# Altium PCB PCB copy.pcbdoc (part 1 of 2)
Units mm, origin at the board's own origin, x right, y up, seen from the top; angles counter-clockwise.
Board outline 125.72 x 116.32 mm, 2 copper layers (Top Layer, Bottom Layer); 242 components, 12 nets, 720 pads, 72 vias.
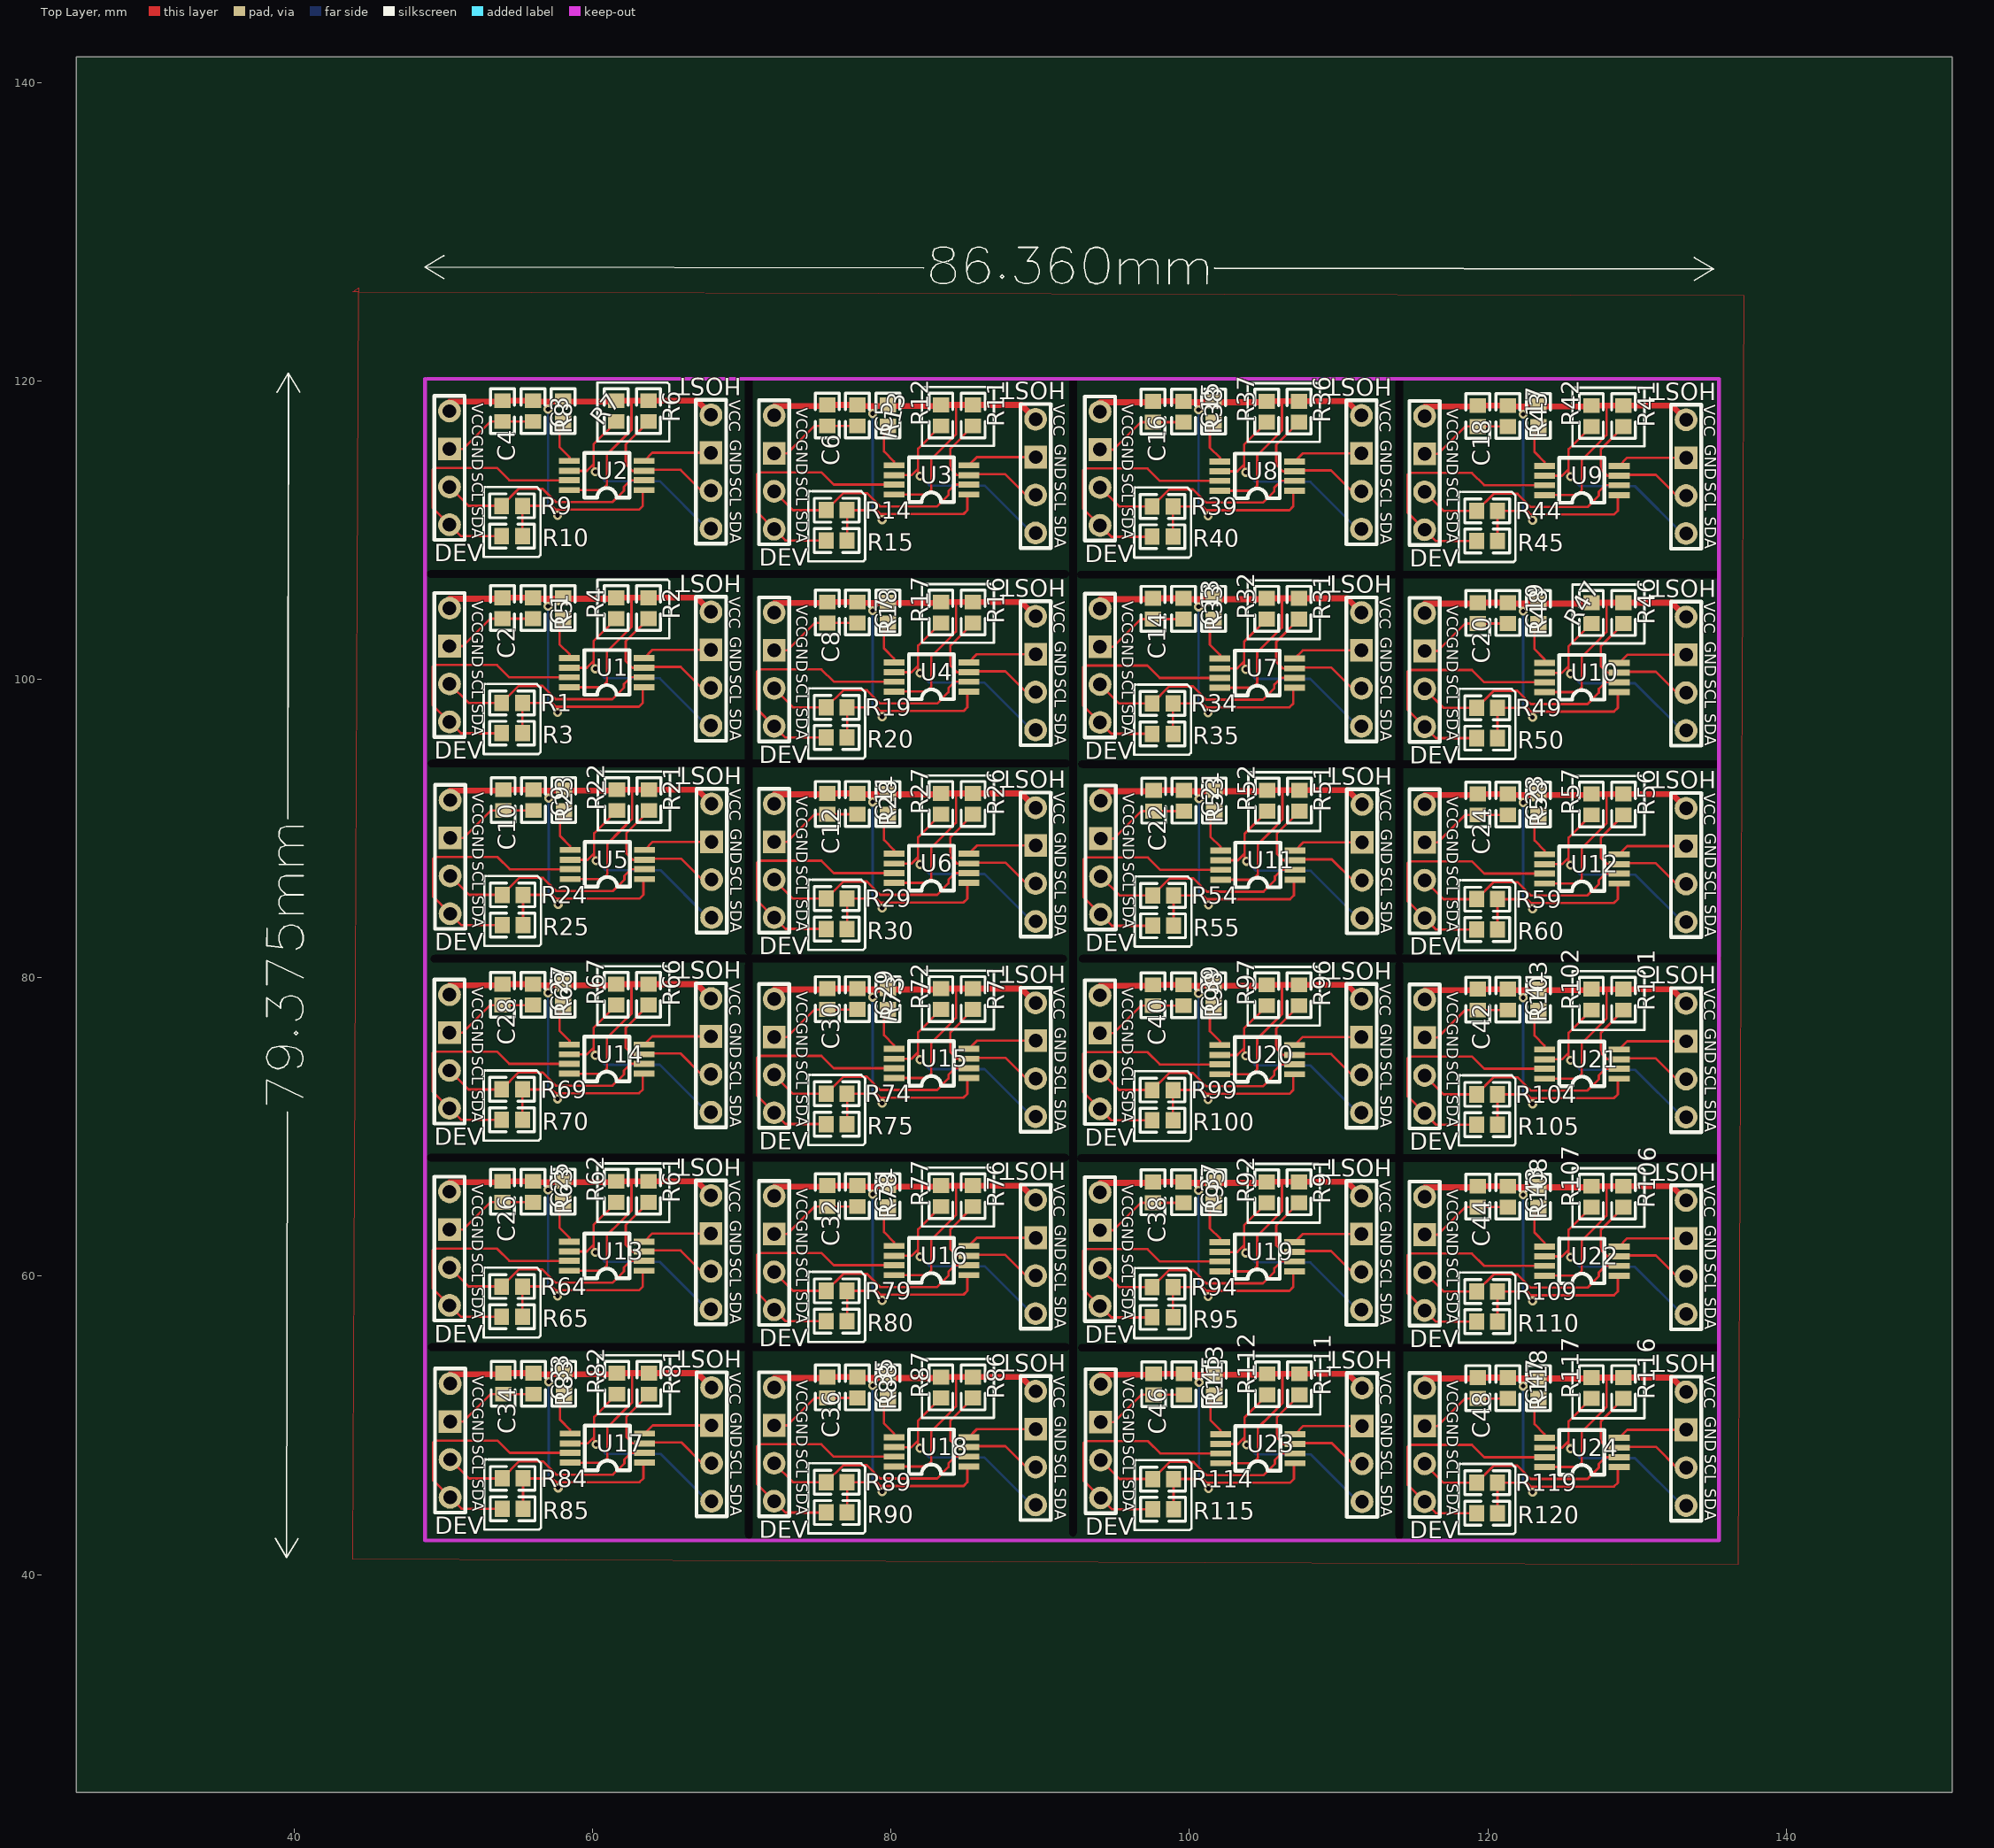
[diagram p0: Top Layer view]
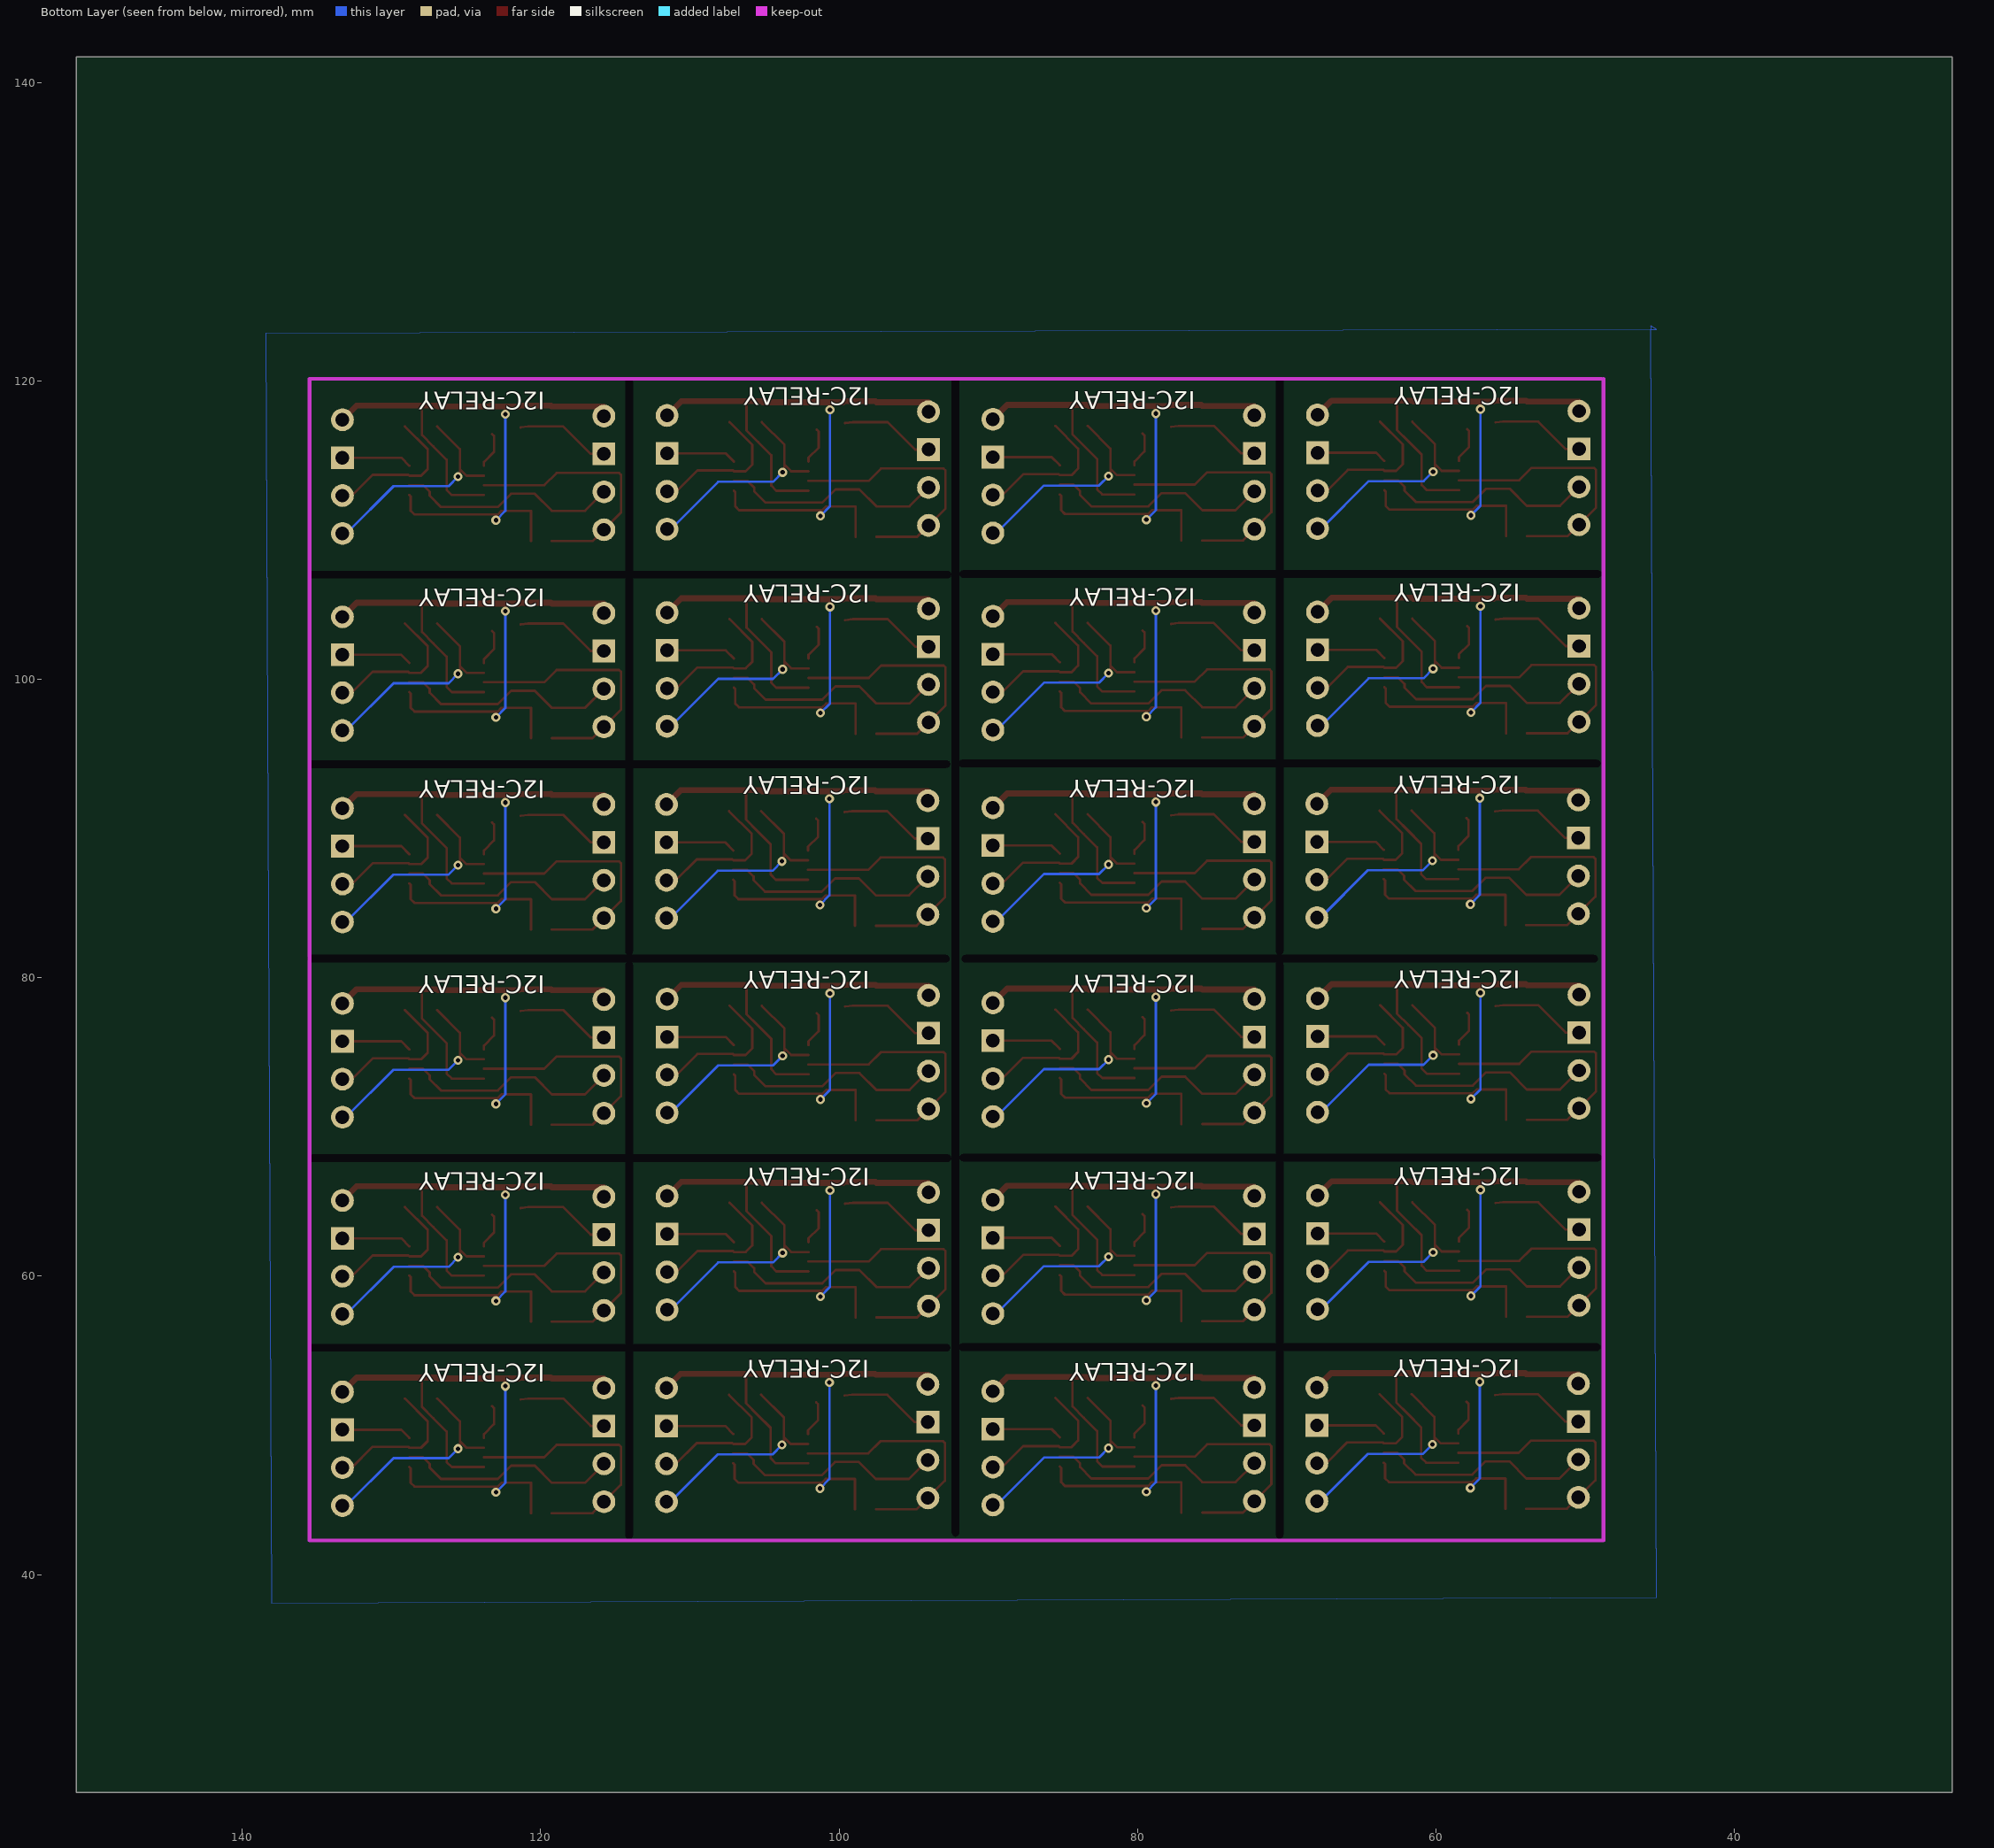
[diagram p1: Bottom Layer view, seen from below]

## Layer stack, top to bottom
Top Layer: signal copper (thickness not stored)
Dielectric: dielectric 0.32, FR-4, Dk 4.8
Bottom Layer: signal copper (thickness not stored)

## Board outline
151.121,25.4 25.4,25.4 25.4,141.72 151.121,141.72
cut-out: 49.14,107.311 91.685,107.311 cw(c91.685,107.061) 91.685,106.811 49.14,106.811 cw(c49.14,107.061) 49.14,107.311
cut-out: 70.226,81.788 70.226,120.015 cw(c70.476,120.015) 70.726,120.015 70.726,81.788 cw(c70.476,81.788) 70.226,81.788
cut-out: 49.204,94.611 91.749,94.611 cw(c91.749,94.361) 91.749,94.111 49.204,94.111 cw(c49.204,94.361) 49.204,94.611
cut-out: 92.739,107.273 135.284,107.273 cw(c135.284,107.023) 135.284,106.773 92.739,106.773 cw(c92.739,107.023) 92.739,107.273
cut-out: 113.825,81.75 113.825,119.977 cw(c114.075,119.977) 114.325,119.977 114.325,81.75 cw(c114.075,81.75) 113.825,81.75
cut-out: 92.803,94.573 135.348,94.573 cw(c135.348,94.323) 135.348,94.073 92.803,94.073 cw(c92.803,94.323) 92.803,94.573
cut-out: 49.14,68.195 91.685,68.195 cw(c91.685,67.945) 91.685,67.695 49.14,67.695 cw(c49.14,67.945) 49.14,68.195
cut-out: 70.226,42.672 70.226,80.899 cw(c70.476,80.899) 70.726,80.899 70.726,42.672 cw(c70.476,42.672) 70.226,42.672
cut-out: 49.204,55.495 91.749,55.495 cw(c91.749,55.245) 91.749,54.995 49.204,54.995 cw(c49.204,55.245) 49.204,55.495
cut-out: 92.739,68.157 135.284,68.157 cw(c135.284,67.907) 135.284,67.657 92.739,67.657 cw(c92.739,67.907) 92.739,68.157
cut-out: 113.825,42.634 113.825,80.861 cw(c114.075,80.861) 114.325,80.861 114.325,42.634 cw(c114.075,42.634) 113.825,42.634
cut-out: 92.803,55.457 135.348,55.457 cw(c135.348,55.207) 135.348,54.957 92.803,54.957 cw(c92.803,55.207) 92.803,55.457
cut-out: 135.373,81.03 92.848,81.03 cw(c92.848,81.28) 92.848,81.53 135.373,81.53 cw(c135.373,81.28) 135.373,81.03
cut-out: 92.443,120.015 92.443,42.799 cw(c92.193,42.799) 91.943,42.799 91.943,120.015 cw(c92.193,120.015) 92.443,120.015
cut-out: 49.394,81.53 91.539,81.53 cw(c91.539,81.28) 91.539,81.03 49.394,81.03 cw(c49.394,81.28) 49.394,81.53

## Components (designator, comment, footprint, x,y, rotation, side; value= is the part's Value field where it differs from the comment)
C1 "100nF" 0603 55.998,104.775 r270 top
C2 "10uF" 0603 53.966,104.775 r270 top
C3 "100nF" 0603 55.998,117.983 r270 top
C4 "10uF" 0603 53.966,117.983 r270 top
C5 "100nF" 0603 77.753,117.691 r270 top
C6 "10uF" 0603 75.721,117.691 r270 top
C7 "100nF" 0603 77.753,104.483 r270 top
C8 "10uF" 0603 75.721,104.483 r270 top
C9 "100nF" 0603 56.036,91.91 r270 top
C10 "10uF" 0603 54.004,91.91 r270 top
C11 "100nF" 0603 77.753,91.656 r270 top
C12 "10uF" 0603 75.721,91.656 r270 top
C13 "100nF" 0603 99.597,104.737 r270 top
C14 "10uF" 0603 97.565,104.737 r270 top
C15 "100nF" 0603 99.597,117.945 r270 top
C16 "10uF" 0603 97.565,117.945 r270 top
C17 "100nF" 0603 121.352,117.653 r270 top
C18 "10uF" 0603 119.32,117.653 r270 top
C19 "100nF" 0603 121.352,104.445 r270 top
C20 "10uF" 0603 119.32,104.445 r270 top
C21 "100nF" 0603 99.635,91.872 r270 top
C22 "10uF" 0603 97.603,91.872 r270 top
C23 "100nF" 0603 121.352,91.618 r270 top
C24 "10uF" 0603 119.32,91.618 r270 top
C25 "100nF" 0603 55.998,65.659 r270 top
C26 "10uF" 0603 53.966,65.659 r270 top
C27 "100nF" 0603 55.998,78.867 r270 top
C28 "10uF" 0603 53.966,78.867 r270 top
C29 "100nF" 0603 77.753,78.575 r270 top
C30 "10uF" 0603 75.721,78.575 r270 top
C31 "100nF" 0603 77.753,65.367 r270 top
C32 "10uF" 0603 75.721,65.367 r270 top
C33 "100nF" 0603 56.036,52.794 r270 top
C34 "10uF" 0603 54.004,52.794 r270 top
C35 "100nF" 0603 77.753,52.54 r270 top
C36 "10uF" 0603 75.721,52.54 r270 top
C37 "100nF" 0603 99.597,65.621 r270 top
C38 "10uF" 0603 97.565,65.621 r270 top
C39 "100nF" 0603 99.597,78.829 r270 top
C40 "10uF" 0603 97.565,78.829 r270 top
C41 "100nF" 0603 121.352,78.537 r270 top
C42 "10uF" 0603 119.32,78.537 r270 top
C43 "100nF" 0603 121.352,65.329 r270 top
C44 "10uF" 0603 119.32,65.329 r270 top
C45 "100nF" 0603 99.635,52.756 r270 top
C46 "10uF" 0603 97.603,52.756 r270 top
C47 "100nF" 0603 121.352,52.502 r270 top
C48 "10uF" 0603 119.32,52.502 r270 top
DEV "4PIN_I2C" 4PIN_I2C 50.41,102.235 r180 top
DEV "4PIN_I2C" 4PIN_I2C 50.41,115.443 r180 top
DEV "4PIN_I2C" 4PIN_I2C 72.165,115.151 r180 top
DEV "4PIN_I2C" 4PIN_I2C 72.165,101.943 r180 top
DEV "4PIN_I2C" 4PIN_I2C 50.448,89.37 r180 top
DEV "4PIN_I2C" 4PIN_I2C 72.165,89.116 r180 top
DEV "4PIN_I2C" 4PIN_I2C 94.009,102.197 r180 top
DEV "4PIN_I2C" 4PIN_I2C 94.009,115.405 r180 top
DEV "4PIN_I2C" 4PIN_I2C 115.764,115.113 r180 top
DEV "4PIN_I2C" 4PIN_I2C 115.764,101.905 r180 top
DEV "4PIN_I2C" 4PIN_I2C 94.047,89.332 r180 top
DEV "4PIN_I2C" 4PIN_I2C 115.764,89.078 r180 top
DEV "4PIN_I2C" 4PIN_I2C 50.41,63.119 r180 top
DEV "4PIN_I2C" 4PIN_I2C 50.41,76.327 r180 top
DEV "4PIN_I2C" 4PIN_I2C 72.165,76.035 r180 top
DEV "4PIN_I2C" 4PIN_I2C 72.165,62.827 r180 top
DEV "4PIN_I2C" 4PIN_I2C 50.448,50.254 r180 top
DEV "4PIN_I2C" 4PIN_I2C 72.165,50 r180 top
DEV "4PIN_I2C" 4PIN_I2C 94.009,63.081 r180 top
DEV "4PIN_I2C" 4PIN_I2C 94.009,76.289 r180 top
DEV "4PIN_I2C" 4PIN_I2C 115.764,75.997 r180 top
DEV "4PIN_I2C" 4PIN_I2C 115.764,62.789 r180 top
DEV "4PIN_I2C" 4PIN_I2C 94.047,50.216 r180 top
DEV "4PIN_I2C" 4PIN_I2C 115.764,49.962 r180 top
HOST "4PIN_I2C" 4PIN_I2C 67.936,101.981 r180 top
HOST "4PIN_I2C" 4PIN_I2C 67.936,115.189 r180 top
HOST "4PIN_I2C" 4PIN_I2C 89.691,114.897 r180 top
HOST "4PIN_I2C" 4PIN_I2C 89.691,101.689 r180 top
HOST "4PIN_I2C" 4PIN_I2C 67.974,89.116 r180 top
HOST "4PIN_I2C" 4PIN_I2C 89.691,88.862 r180 top
HOST "4PIN_I2C" 4PIN_I2C 111.535,101.943 r180 top
HOST "4PIN_I2C" 4PIN_I2C 111.535,115.151 r180 top
HOST "4PIN_I2C" 4PIN_I2C 133.29,114.859 r180 top
HOST "4PIN_I2C" 4PIN_I2C 133.29,101.651 r180 top
HOST "4PIN_I2C" 4PIN_I2C 111.573,89.078 r180 top
HOST "4PIN_I2C" 4PIN_I2C 133.29,88.824 r180 top
HOST "4PIN_I2C" 4PIN_I2C 67.936,62.865 r180 top
HOST "4PIN_I2C" 4PIN_I2C 67.936,76.073 r180 top
HOST "4PIN_I2C" 4PIN_I2C 89.691,75.781 r180 top
HOST "4PIN_I2C" 4PIN_I2C 89.691,62.573 r180 top
HOST "4PIN_I2C" 4PIN_I2C 67.974,50 r180 top
HOST "4PIN_I2C" 4PIN_I2C 89.691,49.746 r180 top
HOST "4PIN_I2C" 4PIN_I2C 111.535,62.827 r180 top
HOST "4PIN_I2C" 4PIN_I2C 111.535,76.035 r180 top
HOST "4PIN_I2C" 4PIN_I2C 133.29,75.743 r180 top
HOST "4PIN_I2C" 4PIN_I2C 133.29,62.535 r180 top
HOST "4PIN_I2C" 4PIN_I2C 111.573,49.962 r180 top
HOST "4PIN_I2C" 4PIN_I2C 133.29,49.708 r180 top
R1 "2.2K" 0603 54.601,98.425 r0 top
R2 "10K" 0603 63.745,104.775 r90 top
R3 "2.2K" 0603 54.601,96.393 r0 top
R4 "10K" 0603 61.586,104.775 r90 top
R5 "10K" 0603 58.03,104.775 r90 top
R6 "10K" 0603 63.745,117.983 r90 top
R7 "10K" 0603 61.586,117.983 r90 top
R8 "10K" 0603 58.03,117.983 r90 top
R9 "2.2K" 0603 54.601,111.633 r0 top
R10 "2.2K" 0603 54.601,109.601 r0 top
R11 "10K" 0603 85.5,117.691 r90 top
R12 "10K" 0603 83.341,117.691 r90 top
R13 "10K" 0603 79.785,117.691 r90 top
R14 "2.2K" 0603 76.356,111.341 r0 top
R15 "2.2K" 0603 76.356,109.309 r0 top
R16 "10K" 0603 85.5,104.483 r90 top
R17 "10K" 0603 83.341,104.483 r90 top
R18 "10K" 0603 79.785,104.483 r90 top
R19 "2.2K" 0603 76.356,98.133 r0 top
R20 "2.2K" 0603 76.356,96.101 r0 top
R21 "10K" 0603 63.783,91.91 r90 top
R22 "10K" 0603 61.624,91.91 r90 top
R23 "10K" 0603 58.068,91.91 r90 top
R24 "2.2K" 0603 54.639,85.56 r0 top
R25 "2.2K" 0603 54.639,83.528 r0 top
R26 "10K" 0603 85.5,91.656 r90 top
R27 "10K" 0603 83.341,91.656 r90 top
R28 "10K" 0603 79.785,91.656 r90 top
R29 "2.2K" 0603 76.356,85.306 r0 top
R30 "2.2K" 0603 76.356,83.274 r0 top
R31 "10K" 0603 107.344,104.737 r90 top
R32 "10K" 0603 105.185,104.737 r90 top
R33 "10K" 0603 101.629,104.737 r90 top
R34 "2.2K" 0603 98.2,98.387 r0 top
R35 "2.2K" 0603 98.2,96.355 r0 top
R36 "10K" 0603 107.344,117.945 r90 top
R37 "10K" 0603 105.185,117.945 r90 top
R38 "10K" 0603 101.629,117.945 r90 top
R39 "2.2K" 0603 98.2,111.595 r0 top
R40 "2.2K" 0603 98.2,109.563 r0 top
R41 "10K" 0603 129.099,117.653 r90 top
R42 "10K" 0603 126.94,117.653 r90 top
R43 "10K" 0603 123.384,117.653 r90 top
R44 "2.2K" 0603 119.955,111.303 r0 top
R45 "2.2K" 0603 119.955,109.271 r0 top
R46 "10K" 0603 129.099,104.445 r90 top
R47 "10K" 0603 126.94,104.445 r90 top
R48 "10K" 0603 123.384,104.445 r90 top
R49 "2.2K" 0603 119.955,98.095 r0 top
R50 "2.2K" 0603 119.955,96.063 r0 top
R51 "10K" 0603 107.382,91.872 r90 top
R52 "10K" 0603 105.223,91.872 r90 top
R53 "10K" 0603 101.667,91.872 r90 top
R54 "2.2K" 0603 98.238,85.522 r0 top
R55 "2.2K" 0603 98.238,83.49 r0 top
R56 "10K" 0603 129.099,91.618 r90 top
R57 "10K" 0603 126.94,91.618 r90 top
R58 "10K" 0603 123.384,91.618 r90 top
R59 "2.2K" 0603 119.955,85.268 r0 top
R60 "2.2K" 0603 119.955,83.236 r0 top
R61 "10K" 0603 63.745,65.659 r90 top
R62 "10K" 0603 61.586,65.659 r90 top
R63 "10K" 0603 58.03,65.659 r90 top
R64 "2.2K" 0603 54.601,59.309 r0 top
R65 "2.2K" 0603 54.601,57.277 r0 top
R66 "10K" 0603 63.745,78.867 r90 top
R67 "10K" 0603 61.586,78.867 r90 top
R68 "10K" 0603 58.03,78.867 r90 top
R69 "2.2K" 0603 54.601,72.517 r0 top
R70 "2.2K" 0603 54.601,70.485 r0 top
R71 "10K" 0603 85.5,78.575 r90 top
R72 "10K" 0603 83.341,78.575 r90 top
R73 "10K" 0603 79.785,78.575 r90 top
R74 "2.2K" 0603 76.356,72.225 r0 top
R75 "2.2K" 0603 76.356,70.193 r0 top
R76 "10K" 0603 85.5,65.367 r90 top
R77 "10K" 0603 83.341,65.367 r90 top
R78 "10K" 0603 79.785,65.367 r90 top
R79 "2.2K" 0603 76.356,59.017 r0 top
R80 "2.2K" 0603 76.356,56.985 r0 top
R81 "10K" 0603 63.783,52.794 r90 top
R82 "10K" 0603 61.624,52.794 r90 top
R83 "10K" 0603 58.068,52.794 r90 top
R84 "2.2K" 0603 54.639,46.444 r0 top
R85 "2.2K" 0603 54.639,44.412 r0 top
R86 "10K" 0603 85.5,52.54 r90 top
R87 "10K" 0603 83.341,52.54 r90 top
R88 "10K" 0603 79.785,52.54 r90 top
R89 "2.2K" 0603 76.356,46.19 r0 top
R90 "2.2K" 0603 76.356,44.158 r0 top
R91 "10K" 0603 107.344,65.621 r90 top
R92 "10K" 0603 105.185,65.621 r90 top
R93 "10K" 0603 101.629,65.621 r90 top
R94 "2.2K" 0603 98.2,59.271 r0 top
R95 "2.2K" 0603 98.2,57.239 r0 top
R96 "10K" 0603 107.344,78.829 r90 top
R97 "10K" 0603 105.185,78.829 r90 top
R98 "10K" 0603 101.629,78.829 r90 top
R99 "2.2K" 0603 98.2,72.479 r0 top
R100 "2.2K" 0603 98.2,70.447 r0 top
R101 "10K" 0603 129.099,78.537 r90 top
R102 "10K" 0603 126.94,78.537 r90 top
R103 "10K" 0603 123.384,78.537 r90 top
R104 "2.2K" 0603 119.955,72.187 r0 top
R105 "2.2K" 0603 119.955,70.155 r0 top
R106 "10K" 0603 129.099,65.329 r90 top
R107 "10K" 0603 126.94,65.329 r90 top
R108 "10K" 0603 123.384,65.329 r90 top
R109 "2.2K" 0603 119.955,58.979 r0 top
R110 "2.2K" 0603 119.955,56.947 r0 top
R111 "10K" 0603 107.382,52.756 r90 top
R112 "10K" 0603 105.223,52.756 r90 top
R113 "10K" 0603 101.667,52.756 r90 top
R114 "2.2K" 0603 98.238,46.406 r0 top
R115 "2.2K" 0603 98.238,44.374 r0 top
R116 "10K" 0603 129.099,52.502 r90 top
R117 "10K" 0603 126.94,52.502 r90 top
R118 "10K" 0603 123.384,52.502 r90 top
R119 "2.2K" 0603 119.955,46.152 r0 top
R120 "2.2K" 0603 119.955,44.12 r0 top
U1 "LTC4307CMS8#PBF" MSOP-8 60.951,100.457 r180 top
U2 "LTC4307CMS8#PBF" MSOP-8 60.951,113.665 r180 top
U3 "LTC4307CMS8#PBF" MSOP-8 82.706,113.373 r180 top
U4 "LTC4307CMS8#PBF" MSOP-8 82.706,100.165 r180 top
U5 "LTC4307CMS8#PBF" MSOP-8 60.989,87.592 r180 top
U6 "LTC4307CMS8#PBF" MSOP-8 82.706,87.338 r180 top
U7 "LTC4307CMS8#PBF" MSOP-8 104.55,100.419 r180 top
U8 "LTC4307CMS8#PBF" MSOP-8 104.55,113.627 r180 top
U9 "LTC4307CMS8#PBF" MSOP-8 126.305,113.335 r180 top
U10 "LTC4307CMS8#PBF" MSOP-8 126.305,100.127 r180 top
U11 "LTC4307CMS8#PBF" MSOP-8 104.588,87.554 r180 top
U12 "LTC4307CMS8#PBF" MSOP-8 126.305,87.3 r180 top
U13 "LTC4307CMS8#PBF" MSOP-8 60.951,61.341 r180 top
U14 "LTC4307CMS8#PBF" MSOP-8 60.951,74.549 r180 top
U15 "LTC4307CMS8#PBF" MSOP-8 82.706,74.257 r180 top
U16 "LTC4307CMS8#PBF" MSOP-8 82.706,61.049 r180 top
U17 "LTC4307CMS8#PBF" MSOP-8 60.989,48.476 r180 top
U18 "LTC4307CMS8#PBF" MSOP-8 82.706,48.222 r180 top
U19 "LTC4307CMS8#PBF" MSOP-8 104.55,61.303 r180 top
U20 "LTC4307CMS8#PBF" MSOP-8 104.55,74.511 r180 top
U21 "LTC4307CMS8#PBF" MSOP-8 126.305,74.219 r180 top
U22 "LTC4307CMS8#PBF" MSOP-8 126.305,61.011 r180 top
U23 "LTC4307CMS8#PBF" MSOP-8 104.588,48.438 r180 top
U24 "LTC4307CMS8#PBF" MSOP-8 126.305,48.184 r180 top
? "" ? 91.939,127.745 r0 top
? "" ? 39.379,80.835 r0 top

## Footprints (in the part's own frame and the unit in brackets; to place one, negate y for a bottom-side part, rotate by r counter-clockwise, add the part's x,y. Pads: shape width x height; smd on the part's side, far side on the other; paste and mask are expansions set on the pad)
4PIN_I2C [mil]
  round 60 hole 36: 1(0,200) 2(0,100) 4(0,-100)
  rect 60x60 hole 36: 3(0,0)
  silkscreen extent -40,-140 40,240
0603 [mm]
  rect 1x1.1 smd: 1(-0.7,0) 2(0.7,0)
  silkscreen extent -1.5,-0.8 1.5,0.8
MSOP-8 [mil]
  rect 55x16 smd: 1(-98.5,38.5) 2(-98.5,12.5) 3(-98.5,-12.5) 4(-98.5,-38.5) 5(98.5,-38.5) 6(98.5,-12.5) 7(98.5,12.5) 8(98.5,38.5)
  silkscreen extent -60,-60 60,59
? [mm]
  silkscreen extent -43.18,-1.22 43.18,1.22

## Via types
v1: diameter 0.61, hole 0.305, Top Layer to Bottom Layer, 72 vias

## Text inside footprints (layer, text, board x,y; h text height)
DEV: Top Overlay "VCC" at 51.899,105.28 h0.76 r270; Top Overlay "GND" at 51.899,103.165 h0.76 r270; Top Overlay "SCL" at 51.899,100.66 h0.76 r270; Top Overlay "SDA" at 51.899,98.374 h0.76 r270
DEV: Top Overlay "VCC" at 51.899,118.488 h0.76 r270; Top Overlay "GND" at 51.899,116.373 h0.76 r270; Top Overlay "SCL" at 51.899,113.868 h0.76 r270; Top Overlay "SDA" at 51.899,111.582 h0.76 r270
DEV: Top Overlay "VCC" at 73.654,118.196 h0.76 r270; Top Overlay "GND" at 73.654,116.081 h0.76 r270; Top Overlay "SCL" at 73.654,113.576 h0.76 r270; Top Overlay "SDA" at 73.654,111.29 h0.76 r270
DEV: Top Overlay "VCC" at 73.654,104.988 h0.76 r270; Top Overlay "GND" at 73.654,102.873 h0.76 r270; Top Overlay "SCL" at 73.654,100.368 h0.76 r270; Top Overlay "SDA" at 73.654,98.082 h0.76 r270
DEV: Top Overlay "VCC" at 51.937,92.415 h0.76 r270; Top Overlay "GND" at 51.937,90.3 h0.76 r270; Top Overlay "SCL" at 51.937,87.795 h0.76 r270; Top Overlay "SDA" at 51.937,85.509 h0.76 r270
DEV: Top Overlay "VCC" at 73.654,92.161 h0.76 r270; Top Overlay "GND" at 73.654,90.046 h0.76 r270; Top Overlay "SCL" at 73.654,87.541 h0.76 r270; Top Overlay "SDA" at 73.654,85.255 h0.76 r270
DEV: Top Overlay "VCC" at 95.498,105.242 h0.76 r270; Top Overlay "GND" at 95.498,103.127 h0.76 r270; Top Overlay "SCL" at 95.498,100.622 h0.76 r270; Top Overlay "SDA" at 95.498,98.336 h0.76 r270
DEV: Top Overlay "VCC" at 95.498,118.45 h0.76 r270; Top Overlay "GND" at 95.498,116.335 h0.76 r270; Top Overlay "SCL" at 95.498,113.83 h0.76 r270; Top Overlay "SDA" at 95.498,111.544 h0.76 r270
DEV: Top Overlay "VCC" at 117.253,118.158 h0.76 r270; Top Overlay "GND" at 117.253,116.042 h0.76 r270; Top Overlay "SCL" at 117.253,113.538 h0.76 r270; Top Overlay "SDA" at 117.253,111.252 h0.76 r270
DEV: Top Overlay "VCC" at 117.253,104.95 h0.76 r270; Top Overlay "GND" at 117.253,102.834 h0.76 r270; Top Overlay "SCL" at 117.253,100.33 h0.76 r270; Top Overlay "SDA" at 117.253,98.044 h0.76 r270
DEV: Top Overlay "VCC" at 95.536,92.377 h0.76 r270; Top Overlay "GND" at 95.536,90.261 h0.76 r270; Top Overlay "SCL" at 95.536,87.757 h0.76 r270; Top Overlay "SDA" at 95.536,85.471 h0.76 r270
DEV: Top Overlay "VCC" at 117.253,92.123 h0.76 r270; Top Overlay "GND" at 117.253,90.007 h0.76 r270; Top Overlay "SCL" at 117.253,87.503 h0.76 r270; Top Overlay "SDA" at 117.253,85.217 h0.76 r270
DEV: Top Overlay "VCC" at 51.899,66.164 h0.76 r270; Top Overlay "GND" at 51.899,64.049 h0.76 r270; Top Overlay "SCL" at 51.899,61.544 h0.76 r270; Top Overlay "SDA" at 51.899,59.258 h0.76 r270
DEV: Top Overlay "VCC" at 51.899,79.372 h0.76 r270; Top Overlay "GND" at 51.899,77.257 h0.76 r270; Top Overlay "SCL" at 51.899,74.752 h0.76 r270; Top Overlay "SDA" at 51.899,72.466 h0.76 r270
DEV: Top Overlay "VCC" at 73.654,79.08 h0.76 r270; Top Overlay "GND" at 73.654,76.965 h0.76 r270; Top Overlay "SCL" at 73.654,74.46 h0.76 r270; Top Overlay "SDA" at 73.654,72.174 h0.76 r270
DEV: Top Overlay "VCC" at 73.654,65.872 h0.76 r270; Top Overlay "GND" at 73.654,63.757 h0.76 r270; Top Overlay "SCL" at 73.654,61.252 h0.76 r270; Top Overlay "SDA" at 73.654,58.966 h0.76 r270
DEV: Top Overlay "VCC" at 51.937,53.299 h0.76 r270; Top Overlay "GND" at 51.937,51.184 h0.76 r270; Top Overlay "SCL" at 51.937,48.679 h0.76 r270; Top Overlay "SDA" at 51.937,46.393 h0.76 r270
DEV: Top Overlay "VCC" at 73.654,53.045 h0.76 r270; Top Overlay "GND" at 73.654,50.93 h0.76 r270; Top Overlay "SCL" at 73.654,48.425 h0.76 r270; Top Overlay "SDA" at 73.654,46.139 h0.76 r270
DEV: Top Overlay "VCC" at 95.498,66.126 h0.76 r270; Top Overlay "GND" at 95.498,64.011 h0.76 r270; Top Overlay "SCL" at 95.498,61.506 h0.76 r270; Top Overlay "SDA" at 95.498,59.22 h0.76 r270
DEV: Top Overlay "VCC" at 95.498,79.334 h0.76 r270; Top Overlay "GND" at 95.498,77.219 h0.76 r270; Top Overlay "SCL" at 95.498,74.714 h0.76 r270; Top Overlay "SDA" at 95.498,72.428 h0.76 r270
DEV: Top Overlay "VCC" at 117.253,79.042 h0.76 r270; Top Overlay "GND" at 117.253,76.926 h0.76 r270; Top Overlay "SCL" at 117.253,74.422 h0.76 r270; Top Overlay "SDA" at 117.253,72.136 h0.76 r270
DEV: Top Overlay "VCC" at 117.253,65.834 h0.76 r270; Top Overlay "GND" at 117.253,63.718 h0.76 r270; Top Overlay "SCL" at 117.253,61.214 h0.76 r270; Top Overlay "SDA" at 117.253,58.928 h0.76 r270
DEV: Top Overlay "VCC" at 95.536,53.261 h0.76 r270; Top Overlay "GND" at 95.536,51.145 h0.76 r270; Top Overlay "SCL" at 95.536,48.641 h0.76 r270; Top Overlay "SDA" at 95.536,46.355 h0.76 r270
DEV: Top Overlay "VCC" at 117.253,53.007 h0.76 r270; Top Overlay "GND" at 117.253,50.891 h0.76 r270; Top Overlay "SCL" at 117.253,48.387 h0.76 r270; Top Overlay "SDA" at 117.253,46.101 h0.76 r270
HOST: Top Overlay "VCC" at 69.138,105.537 h0.76 r270; Top Overlay "GND" at 69.206,102.87 h0.76 r270; Top Overlay "SCL" at 69.206,100.33 h0.76 r270; Top Overlay "SDA" at 69.206,98.044 h0.76 r270
HOST: Top Overlay "VCC" at 69.138,118.745 h0.76 r270; Top Overlay "GND" at 69.206,116.078 h0.76 r270; Top Overlay "SCL" at 69.206,113.538 h0.76 r270; Top Overlay "SDA" at 69.206,111.252 h0.76 r270
HOST: Top Overlay "VCC" at 90.893,118.453 h0.76 r270; Top Overlay "GND" at 90.961,115.786 h0.76 r270; Top Overlay "SCL" at 90.961,113.246 h0.76 r270; Top Overlay "SDA" at 90.961,110.96 h0.76 r270
HOST: Top Overlay "VCC" at 90.893,105.245 h0.76 r270; Top Overlay "GND" at 90.961,102.578 h0.76 r270; Top Overlay "SCL" at 90.961,100.038 h0.76 r270; Top Overlay "SDA" at 90.961,97.752 h0.76 r270
HOST: Top Overlay "VCC" at 69.176,92.672 h0.76 r270; Top Overlay "GND" at 69.244,90.005 h0.76 r270; Top Overlay "SCL" at 69.244,87.465 h0.76 r270; Top Overlay "SDA" at 69.244,85.179 h0.76 r270
HOST: Top Overlay "VCC" at 90.893,92.418 h0.76 r270; Top Overlay "GND" at 90.961,89.751 h0.76 r270; Top Overlay "SCL" at 90.961,87.211 h0.76 r270; Top Overlay "SDA" at 90.961,84.925 h0.76 r270
HOST: Top Overlay "VCC" at 112.737,105.499 h0.76 r270; Top Overlay "GND" at 112.805,102.832 h0.76 r270; Top Overlay "SCL" at 112.805,100.292 h0.76 r270; Top Overlay "SDA" at 112.805,98.006 h0.76 r270
HOST: Top Overlay "VCC" at 112.737,118.707 h0.76 r270; Top Overlay "GND" at 112.805,116.04 h0.76 r270; Top Overlay "SCL" at 112.805,113.5 h0.76 r270; Top Overlay "SDA" at 112.805,111.214 h0.76 r270
HOST: Top Overlay "VCC" at 134.492,118.415 h0.76 r270; Top Overlay "GND" at 134.56,115.748 h0.76 r270; Top Overlay "SCL" at 134.56,113.208 h0.76 r270; Top Overlay "SDA" at 134.56,110.922 h0.76 r270
HOST: Top Overlay "VCC" at 134.492,105.207 h0.76 r270; Top Overlay "GND" at 134.56,102.54 h0.76 r270; Top Overlay "SCL" at 134.56,100 h0.76 r270; Top Overlay "SDA" at 134.56,97.714 h0.76 r270
HOST: Top Overlay "VCC" at 112.775,92.634 h0.76 r270; Top Overlay "GND" at 112.843,89.967 h0.76 r270; Top Overlay "SCL" at 112.843,87.427 h0.76 r270; Top Overlay "SDA" at 112.843,85.141 h0.76 r270
HOST: Top Overlay "VCC" at 134.492,92.38 h0.76 r270; Top Overlay "GND" at 134.56,89.713 h0.76 r270; Top Overlay "SCL" at 134.56,87.173 h0.76 r270; Top Overlay "SDA" at 134.56,84.887 h0.76 r270
HOST: Top Overlay "VCC" at 69.138,66.421 h0.76 r270; Top Overlay "GND" at 69.206,63.754 h0.76 r270; Top Overlay "SCL" at 69.206,61.214 h0.76 r270; Top Overlay "SDA" at 69.206,58.928 h0.76 r270
HOST: Top Overlay "VCC" at 69.138,79.629 h0.76 r270; Top Overlay "GND" at 69.206,76.962 h0.76 r270; Top Overlay "SCL" at 69.206,74.422 h0.76 r270; Top Overlay "SDA" at 69.206,72.136 h0.76 r270
HOST: Top Overlay "VCC" at 90.893,79.337 h0.76 r270; Top Overlay "GND" at 90.961,76.67 h0.76 r270; Top Overlay "SCL" at 90.961,74.13 h0.76 r270; Top Overlay "SDA" at 90.961,71.844 h0.76 r270
HOST: Top Overlay "VCC" at 90.893,66.129 h0.76 r270; Top Overlay "GND" at 90.961,63.462 h0.76 r270; Top Overlay "SCL" at 90.961,60.922 h0.76 r270; Top Overlay "SDA" at 90.961,58.636 h0.76 r270
HOST: Top Overlay "VCC" at 69.176,53.556 h0.76 r270; Top Overlay "GND" at 69.244,50.889 h0.76 r270; Top Overlay "SCL" at 69.244,48.349 h0.76 r270; Top Overlay "SDA" at 69.244,46.063 h0.76 r270
HOST: Top Overlay "VCC" at 90.893,53.302 h0.76 r270; Top Overlay "GND" at 90.961,50.635 h0.76 r270; Top Overlay "SCL" at 90.961,48.095 h0.76 r270; Top Overlay "SDA" at 90.961,45.809 h0.76 r270
HOST: Top Overlay "VCC" at 112.737,66.383 h0.76 r270; Top Overlay "GND" at 112.805,63.716 h0.76 r270; Top Overlay "SCL" at 112.805,61.176 h0.76 r270; Top Overlay "SDA" at 112.805,58.89 h0.76 r270
HOST: Top Overlay "VCC" at 112.737,79.591 h0.76 r270; Top Overlay "GND" at 112.805,76.924 h0.76 r270; Top Overlay "SCL" at 112.805,74.384 h0.76 r270; Top Overlay "SDA" at 112.805,72.098 h0.76 r270
HOST: Top Overlay "VCC" at 134.492,79.299 h0.76 r270; Top Overlay "GND" at 134.56,76.632 h0.76 r270; Top Overlay "SCL" at 134.56,74.092 h0.76 r270; Top Overlay "SDA" at 134.56,71.806 h0.76 r270
HOST: Top Overlay "VCC" at 134.492,66.091 h0.76 r270; Top Overlay "GND" at 134.56,63.424 h0.76 r270; Top Overlay "SCL" at 134.56,60.884 h0.76 r270; Top Overlay "SDA" at 134.56,58.598 h0.76 r270
HOST: Top Overlay "VCC" at 112.775,53.518 h0.76 r270; Top Overlay "GND" at 112.843,50.851 h0.76 r270; Top Overlay "SCL" at 112.843,48.311 h0.76 r270; Top Overlay "SDA" at 112.843,46.025 h0.76 r270
HOST: Top Overlay "VCC" at 134.492,53.264 h0.76 r270; Top Overlay "GND" at 134.56,50.597 h0.76 r270; Top Overlay "SCL" at 134.56,48.057 h0.76 r270; Top Overlay "SDA" at 134.56,45.771 h0.76 r270